# EAGLE board 555 parpadeo (EAGLE 8.0.0)
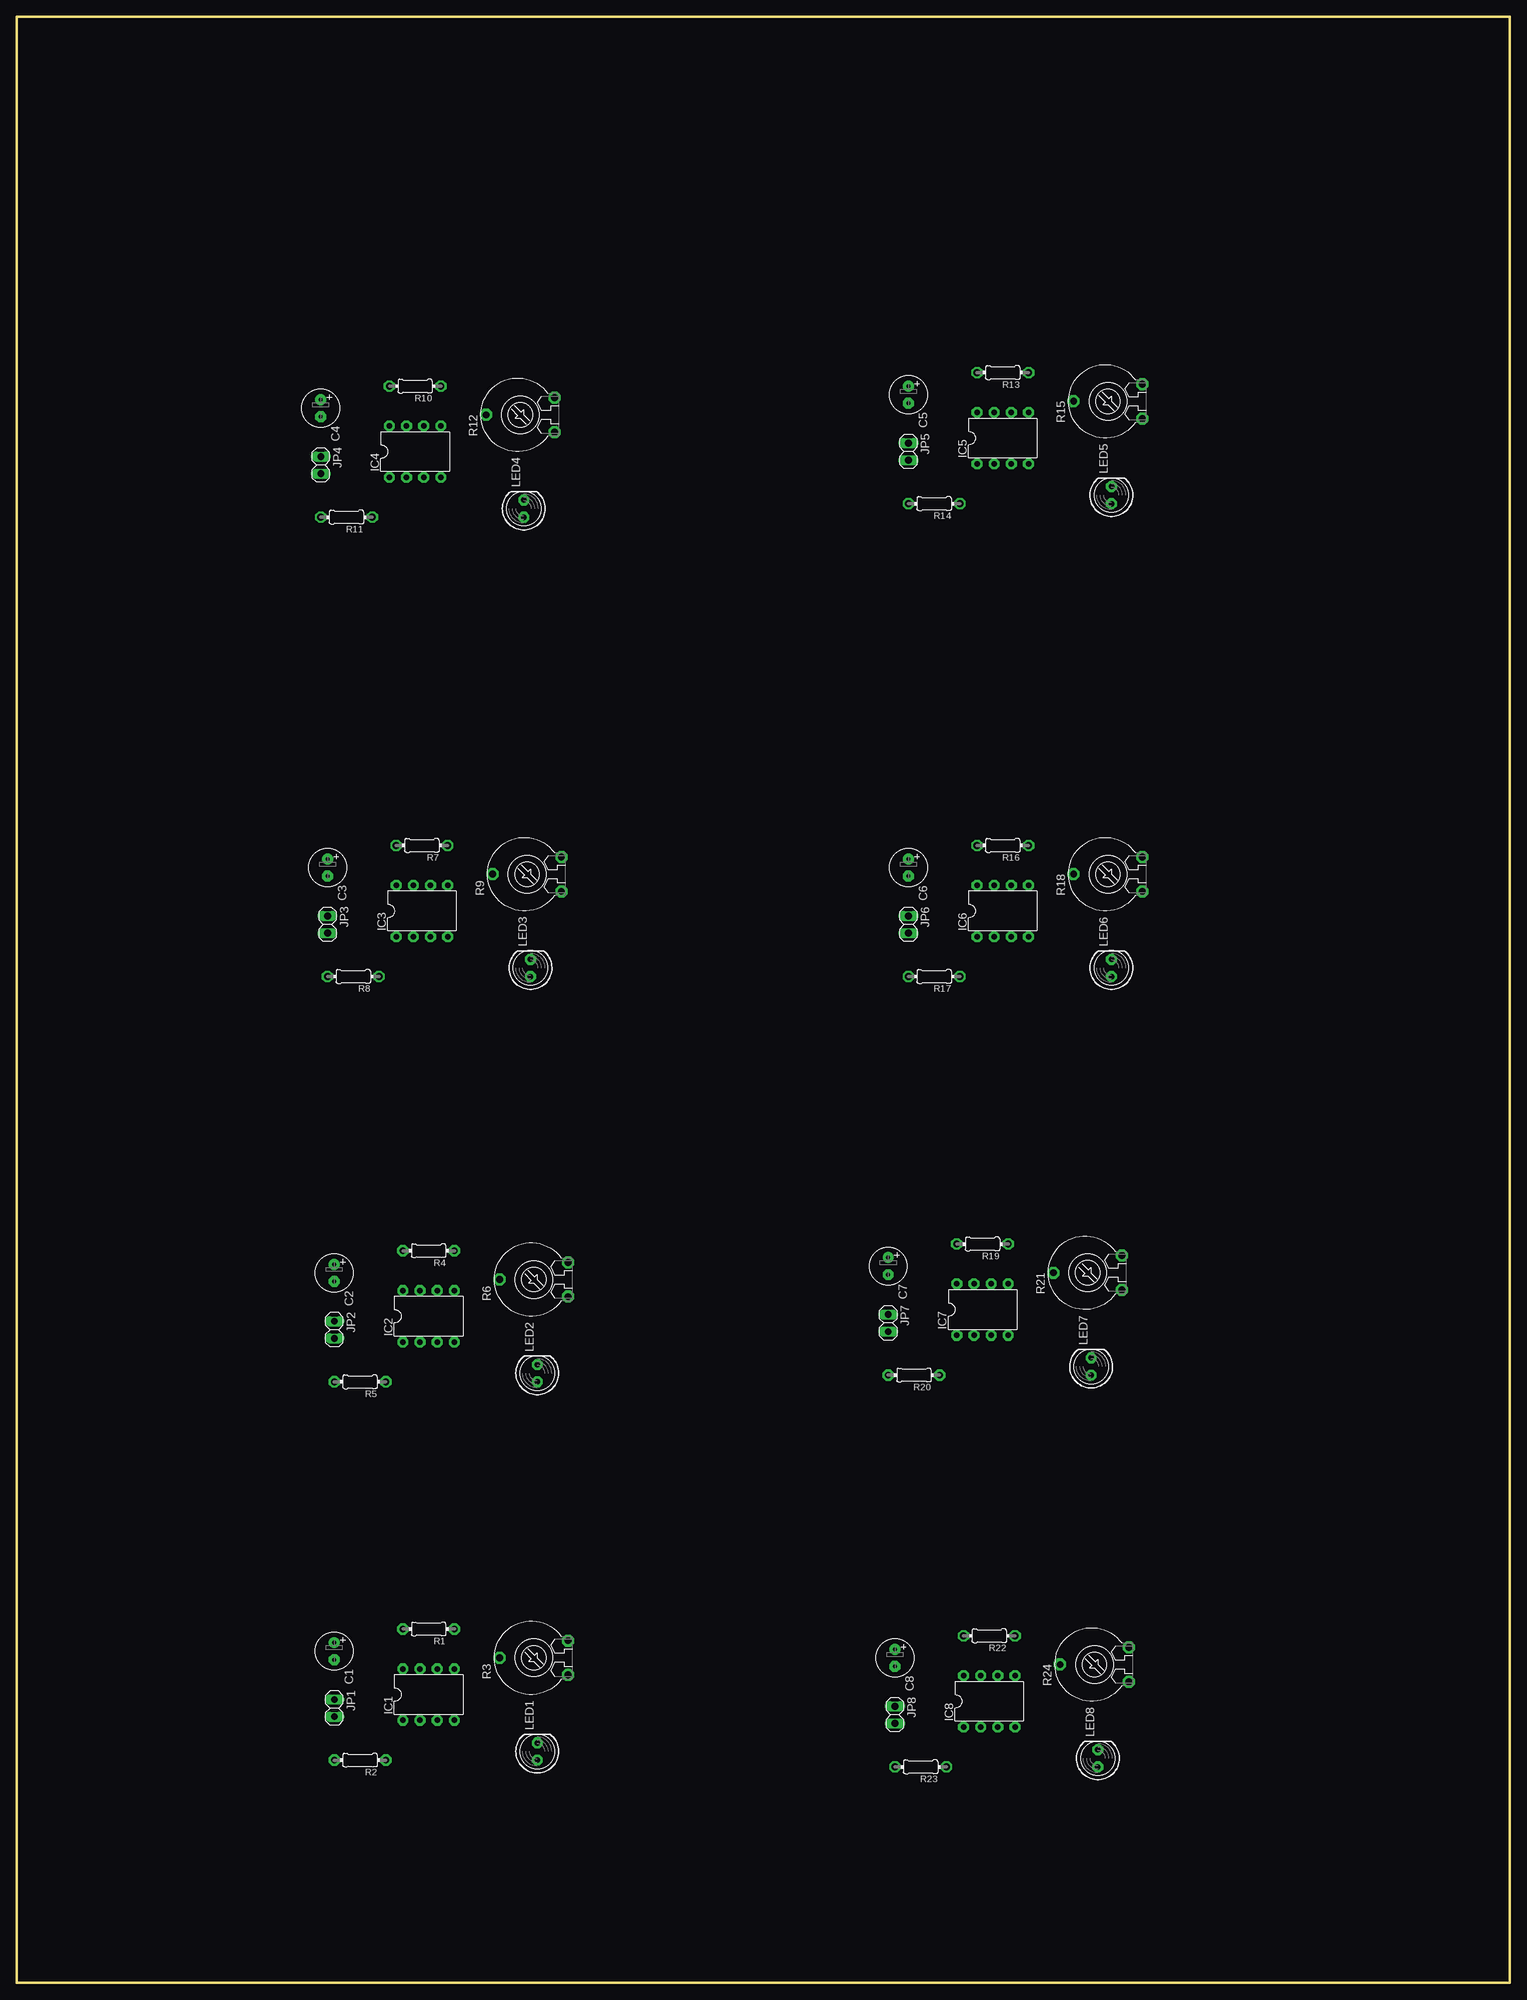
[diagram p0: board, top side]
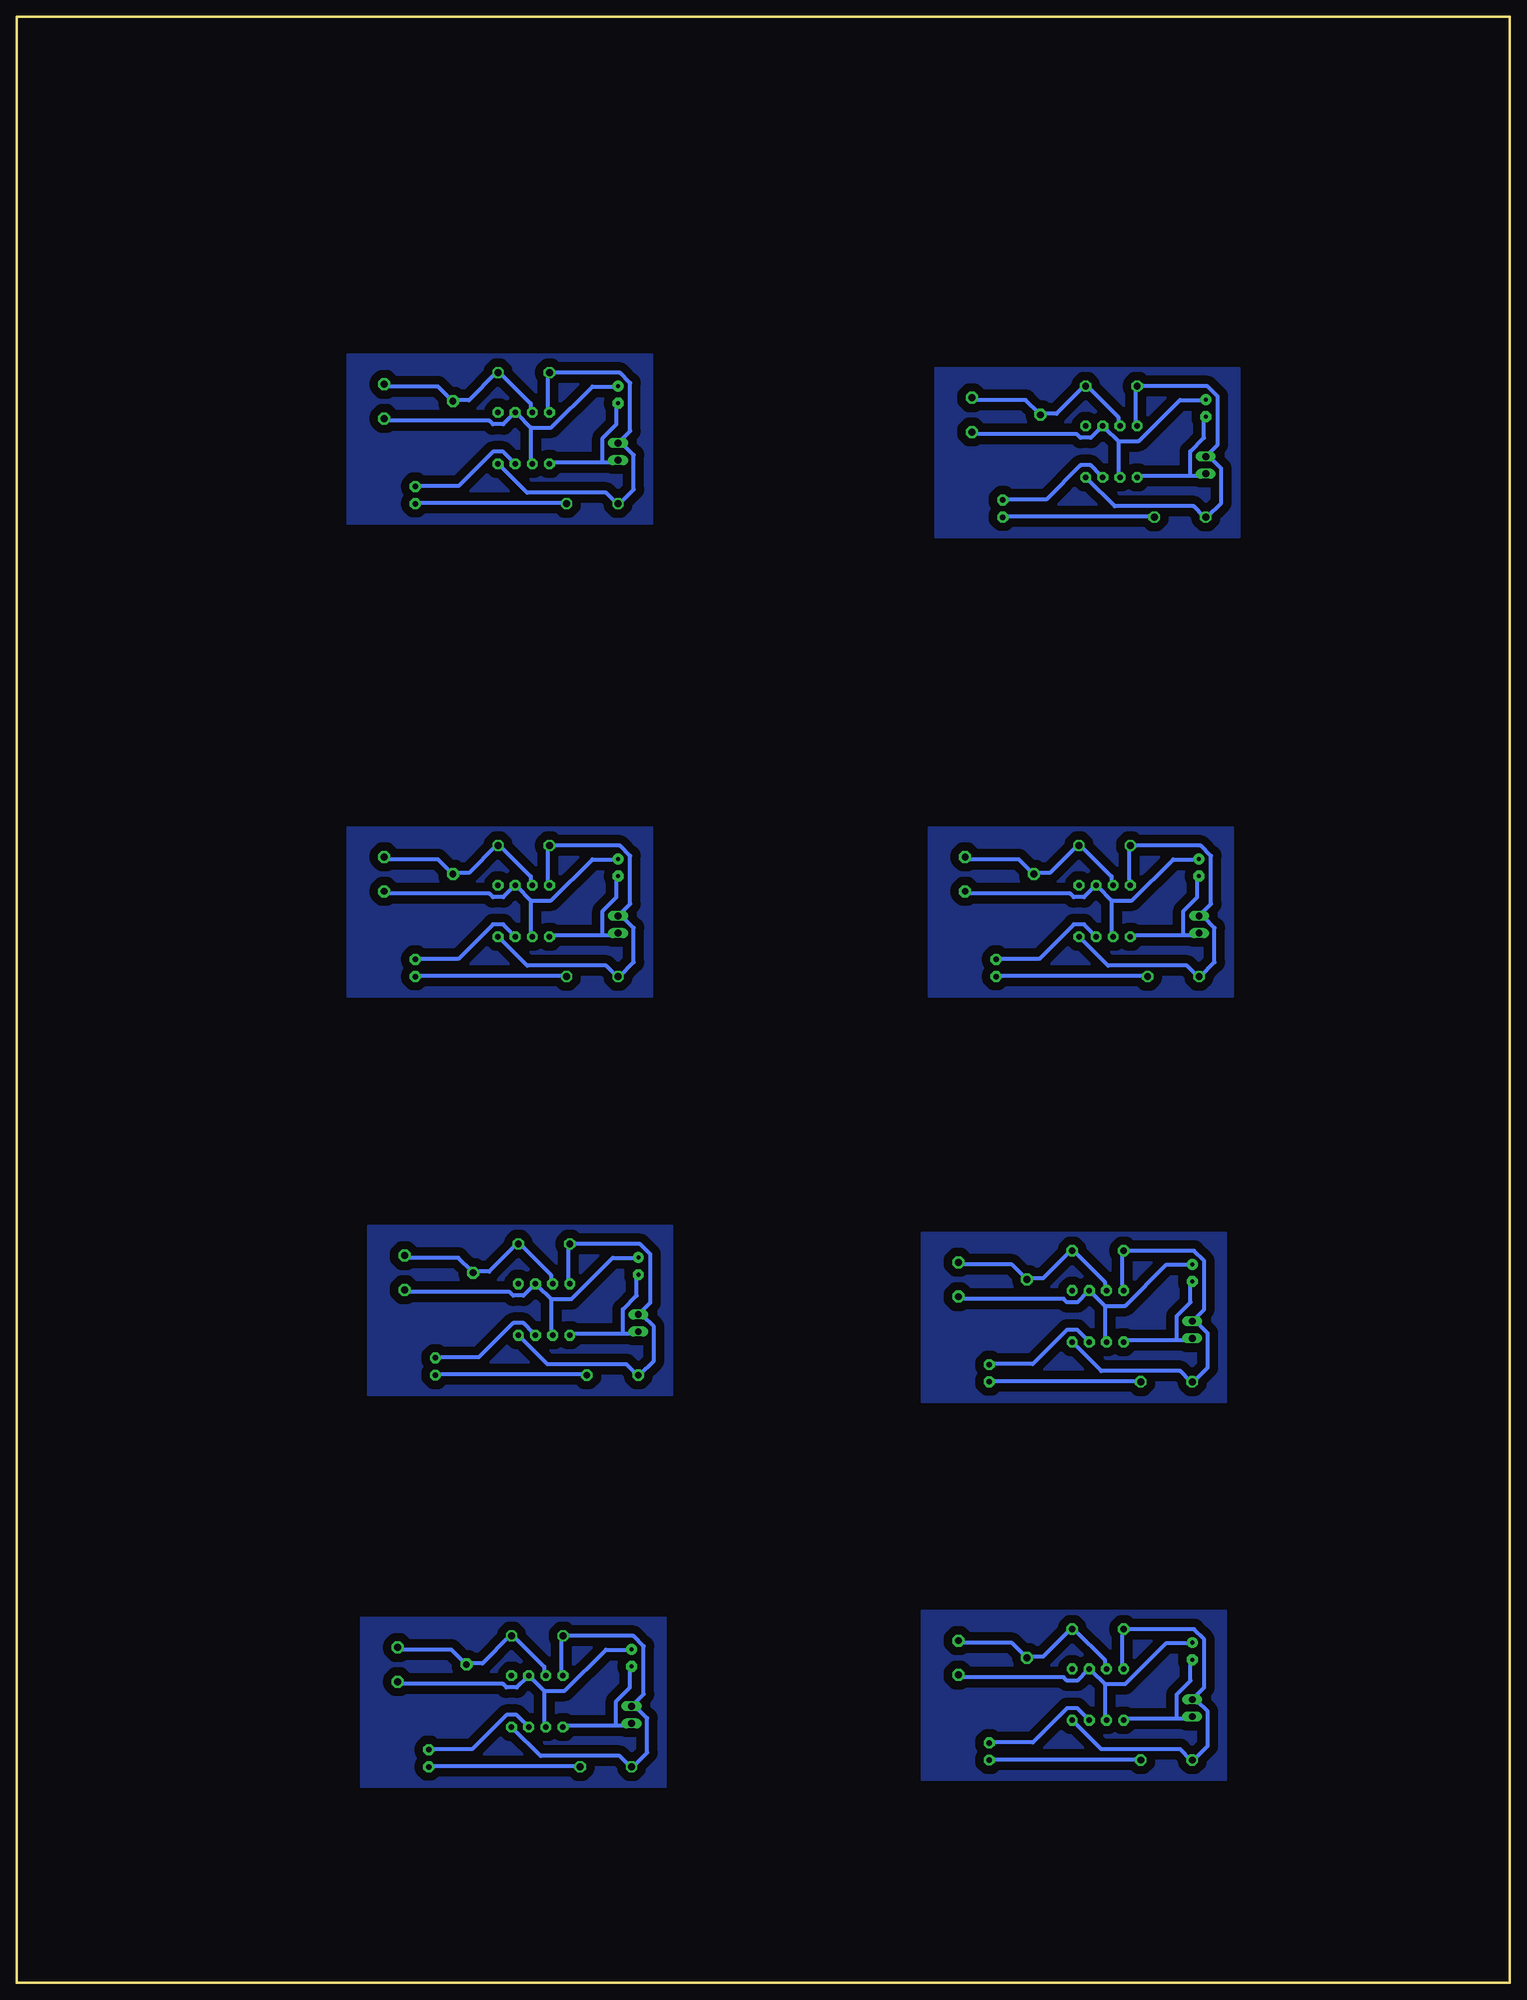
[diagram p1: board, bottom side, seen from below]

Size 221 x 291 mm. Coordinates in mm from the lower left corner, seen from the top.
Outline: 0,0 221,0 221,291 0,291 0,0
Copper layers (1*16): Top 0.035mm / dielectric 1.5mm / Bottom 0.035mm
Design rules "default *": minimum track width 22mil, minimum drill 24mil, track to track 18mil, track to pad 18mil, pad to pad 8mil, via to via 8mil, smd to smd 8mil, copper to edge 40mil, drill to drill 8mil, minimum pad ring 10mil, minimum via ring 8mil, stop-mask expansion 4mil, vias tented up to drill 0mil, thermal gap 10mil

## Footprints (pad centres in the part's own frame; a part is rotated, then mirrored left to right if it is on the bottom)
E2,5-6 = drill 0.6 pad 1.6: + -1.27,0 | drill 0.6 pad 1.6 octagon: - 1.27,0
DIL08 = drill 0.813 pad 1.6 octagon: 1 -3.81,-3.81; 2 -1.27,-3.81; 3 1.27,-3.81; 4 3.81,-3.81; 5 3.81,3.81; 6 1.27,3.81; 7 -1.27,3.81; 8 -3.81,3.81
1X02 = drill 1 long: 1 -1.27,0; 2 1.27,0
LED5MM = drill 0.813 pad 1.6 octagon: A -1.27,0; K 1.27,0
0204/7 = drill 1 pad 1.676 octagon: 1 -3.81,0; 2 3.81,0
PT-10 = drill 1.016 pad 1.778 octagon: 1 -2.54,-5.08; 2 2.54,-5.08; 3 0,5.08

## Placement (x,y rotation side)
C1  10u  [E2,5-6]  46.99,49.07 270 top
C2  10u  [E2,5-6]  46.99,105.07 270 top
C3  10u  [E2,5-6]  45.99,165.07 270 top
C4  10u  [E2,5-6]  44.99,233.07 270 top
C5  10u  [E2,5-6]  131.99,235.07 270 top
C6  10u  [E2,5-6]  131.99,165.07 270 top
C7  10u  [E2,5-6]  128.99,106.07 270 top
C8  10u  [E2,5-6]  129.99,48.07 270 top
IC1  LM555N  [DIL08]  60.96,42.64 0 top
IC2  LM555N  [DIL08]  60.96,98.64 0 top
IC3  LM555N  [DIL08]  59.96,158.64 0 top
IC4  LM555N  [DIL08]  58.96,226.64 0 top
IC5  LM555N  [DIL08]  145.96,228.64 0 top
IC6  LM555N  [DIL08]  145.96,158.64 0 top
IC7  LM555N  [DIL08]  142.96,99.64 0 top
IC8  LM555N  [DIL08]  143.96,41.64 0 top
JP1  [1X02]  46.99,40.64 270 top
JP2  [1X02]  46.99,96.64 270 top
JP3  [1X02]  45.99,156.64 270 top
JP4  [1X02]  44.99,224.64 270 top
JP5  [1X02]  131.99,226.64 270 top
JP6  [1X02]  131.99,156.64 270 top
JP7  [1X02]  128.99,97.64 270 top
JP8  [1X02]  129.99,39.64 270 top
LED1  [LED5MM]  77.04,34.21 90 top
LED2  [LED5MM]  77.04,90.21 90 top
LED3  [LED5MM]  76.04,150.21 90 top
LED4  [LED5MM]  75.04,218.21 90 top
LED5  [LED5MM]  162.04,220.21 90 top
LED6  [LED5MM]  162.04,150.21 90 top
LED7  [LED5MM]  159.04,91.21 90 top
LED8  [LED5MM]  160.04,33.21 90 top
R1  100k  [0204/7]  60.96,52.34 180 top
R2  330  [0204/7]  50.8,32.94 180 top
R3  100k  [PT-10]  76.53,48.09 90 top
R4  100k  [0204/7]  60.96,108.34 180 top
R5  330  [0204/7]  50.8,88.94 180 top
R6  100k  [PT-10]  76.53,104.09 90 top
R7  100k  [0204/7]  59.96,168.34 180 top
R8  330  [0204/7]  49.8,148.94 180 top
R9  100k  [PT-10]  75.53,164.09 90 top
R10  100k  [0204/7]  58.96,236.34 180 top
R11  330  [0204/7]  48.8,216.94 180 top
R12  100k  [PT-10]  74.53,232.09 90 top
R13  100k  [0204/7]  145.96,238.34 180 top
R14  330  [0204/7]  135.8,218.94 180 top
R15  100k  [PT-10]  161.53,234.09 90 top
R16  100k  [0204/7]  145.96,168.34 180 top
R17  330  [0204/7]  135.8,148.94 180 top
R18  100k  [PT-10]  161.53,164.09 90 top
R19  100k  [0204/7]  142.96,109.34 180 top
R20  330  [0204/7]  132.8,89.94 180 top
R21  100k  [PT-10]  158.53,105.09 90 top
R22  100k  [0204/7]  143.96,51.34 180 top
R23  330  [0204/7]  133.8,31.94 180 top
R24  100k  [PT-10]  159.53,47.09 90 top

## Library data of the parts
C1-C8 R1-R24 = rcl
IC1-IC8 = linear
JP1-JP8 = pinhead
LED1-LED8 = led

## Nets
GND: C1.- IC1.1 JP1.2
GND2: C2.- IC2.1 JP2.2
GND3: C3.- IC3.1 JP3.2
GND4: C4.- IC4.1 JP4.2
GND5: C5.- IC5.1 JP5.2
GND6: C6.- IC6.1 JP6.2
GND7: C7.- IC7.1 JP7.2
GND8: C8.- IC8.1 JP8.2
N$1: IC1.3 LED1.K
N$2: LED1.A R2.1
N$4: IC1.7 R1.1 R3.2 R3.3
N$5: C1.+ IC1.2 IC1.6 R3.1
N$10: IC2.3 LED2.K
N$11: LED2.A R5.1
N$12: IC2.7 R4.1 R6.2 R6.3
N$13: C2.+ IC2.2 IC2.6 R6.1
N$15: IC3.3 LED3.K
N$16: LED3.A R8.1
N$17: IC3.7 R7.1 R9.2 R9.3
N$18: C3.+ IC3.2 IC3.6 R9.1
N$20: IC4.3 LED4.K
N$21: LED4.A R11.1
N$22: IC4.7 R10.1 R12.2 R12.3
N$23: C4.+ IC4.2 IC4.6 R12.1
N$25: IC5.3 LED5.K
N$26: LED5.A R14.1
N$27: IC5.7 R13.1 R15.2 R15.3
N$28: C5.+ IC5.2 IC5.6 R15.1
N$30: IC6.3 LED6.K
N$31: LED6.A R17.1
N$32: IC6.7 R16.1 R18.2 R18.3
N$33: C6.+ IC6.2 IC6.6 R18.1
N$35: IC7.3 LED7.K
N$36: LED7.A R20.1
N$37: IC7.7 R19.1 R21.2 R21.3
N$38: C7.+ IC7.2 IC7.6 R21.1
N$40: IC8.3 LED8.K
N$41: LED8.A R23.1
N$42: IC8.7 R22.1 R24.2 R24.3
N$43: C8.+ IC8.2 IC8.6 R24.1
VCC: IC1.4 IC1.8 JP1.1 R1.2 R2.2
VCC2: IC2.4 IC2.8 JP2.1 R4.2 R5.2
VCC3: IC3.4 IC3.8 JP3.1 R7.2 R8.2
VCC4: IC4.4 IC4.8 JP4.1 R10.2 R11.2
VCC5: IC5.4 IC5.8 JP5.1 R13.2 R14.2
VCC6: IC6.4 IC6.8 JP6.1 R16.2 R17.2
VCC7: IC7.4 IC7.8 JP7.1 R19.2 R20.2
VCC8: IC8.4 IC8.8 JP8.1 R22.2 R23.2

## Tracks (layer width: path | path; a pad name or v marks a point on that pad's centre or on a via)
GND
  Bottom 0.559: 49.28,39.12 56.9,39.12 IC1.1 | 49.28,39.12 47.24,39.12 JP1.2 | 49.28,39.12 49.28,42.67 47.24,44.7 47.24,47.75 C1.-
GND2
  Bottom 0.559: 49.28,95.12 56.9,95.12 IC2.1 | 49.28,95.12 47.24,95.12 JP2.2 | 49.28,95.12 49.28,98.67 47.24,100.7 47.24,103.75 C2.-
GND3
  Bottom 0.559: 48.28,155.12 55.9,155.12 IC3.1 | 48.28,155.12 46.24,155.12 JP3.2 | 48.28,155.12 48.28,158.67 46.24,160.7 46.24,163.75 C3.-
GND4
  Bottom 0.559: 47.28,223.12 54.9,223.12 IC4.1 | 47.28,223.12 45.24,223.12 JP4.2 | 47.28,223.12 47.28,226.67 45.24,228.7 45.24,231.75 C4.-
GND5
  Bottom 0.559: 134.28,225.12 141.9,225.12 IC5.1 | 134.28,225.12 132.24,225.12 JP5.2 | 134.28,225.12 134.28,228.67 132.24,230.7 132.24,233.75 C5.-
GND6
  Bottom 0.559: 134.28,155.12 141.9,155.12 IC6.1 | 134.28,155.12 132.24,155.12 JP6.2 | 134.28,155.12 134.28,158.67 132.24,160.7 132.24,163.75 C6.-
GND7
  Bottom 0.559: 131.28,96.12 138.9,96.12 IC7.1 | 131.28,96.12 129.24,96.12 JP7.2 | 131.28,96.12 131.28,99.67 129.24,101.7 129.24,104.75 C7.-
GND8
  Bottom 0.559: 132.28,38.12 139.9,38.12 IC8.1 | 132.28,38.12 130.24,38.12 JP8.2 | 132.28,38.12 132.28,41.67 130.24,43.7 130.24,46.75 C8.-
N$1
  Bottom 0.559: LED1.K 76.71,35.56 70.61,35.56 65.53,40.64 64.01,40.64 62.48,39.12 IC1.3
N$2
  Bottom 0.559: LED1.A 76.71,33.02 54.86,33.02 R2.1
N$3
  pour Bottom (isolate 1.27): 42,55 87,55 87,30 42,30
N$4
  Bottom 0.559: IC1.7 59.94,46.74 59.94,47.75 64.52,52.32 R1.1 65.02,52.32 69.09,48.26 71.12,48.26 R3.3 71.63,48.26 73.66,50.29 81.28,50.29 R3.2
N$5
  Bottom 0.559: 59.94,44.2 59.94,39.12 IC1.2 | 59.94,44.2 61.98,46.23 IC1.6 62.48,46.23 64.01,44.7 65.53,44.7 66.04,45.21 81.28,45.21 R3.1 | 59.94,44.2 56.9,44.2 50.8,50.29 47.24,50.29 C1.+
N$10
  Bottom 0.559: LED2.K 76.71,91.56 70.61,91.56 65.53,96.64 64.01,96.64 62.48,95.12 IC2.3
N$11
  Bottom 0.559: LED2.A 76.71,89.02 54.86,89.02 R5.1
N$12
  Bottom 0.559: IC2.7 59.94,102.74 59.94,103.75 64.52,108.32 R4.1 65.02,108.32 69.09,104.26 71.12,104.26 R6.3 71.63,104.26 73.66,106.29 81.28,106.29 R6.2
N$13
  Bottom 0.559: 59.94,100.2 59.94,95.12 IC2.2 | 59.94,100.2 61.98,102.23 IC2.6 62.48,102.23 64.01,100.7 65.53,100.7 66.04,101.21 81.28,101.21 R6.1 | 59.94,100.2 56.9,100.2 50.8,106.29 47.24,106.29 C2.+
N$14
  pour Bottom (isolate 1.27): 42,111 87,111 87,86 42,86
N$15
  Bottom 0.559: LED3.K 75.71,151.56 69.61,151.56 64.53,156.64 63.01,156.64 61.48,155.12 IC3.3
N$16
  Bottom 0.559: LED3.A 75.71,149.02 53.86,149.02 R8.1
N$17
  Bottom 0.559: IC3.7 58.94,162.74 58.94,163.75 63.52,168.32 R7.1 64.02,168.32 68.09,164.26 70.12,164.26 R9.3 70.63,164.26 72.66,166.29 80.28,166.29 R9.2
N$18
  Bottom 0.559: 58.94,160.2 58.94,155.12 IC3.2 | 58.94,160.2 60.98,162.23 IC3.6 61.48,162.23 63.01,160.7 64.53,160.7 65.04,161.21 80.28,161.21 R9.1 | 58.94,160.2 55.9,160.2 49.8,166.29 46.24,166.29 C3.+
N$19
  pour Bottom (isolate 1.27): 41,171 86,171 86,146 41,146
N$20
  Bottom 0.559: LED4.K 74.71,219.56 68.61,219.56 63.53,224.64 62.01,224.64 60.48,223.12 IC4.3
N$21
  Bottom 0.559: LED4.A 74.71,217.02 52.86,217.02 R11.1
N$22
  Bottom 0.559: IC4.7 57.94,230.74 57.94,231.75 62.52,236.32 R10.1 63.02,236.32 67.09,232.26 69.12,232.26 R12.3 69.63,232.26 71.66,234.29 79.28,234.29 R12.2
N$23
  Bottom 0.559: 57.94,228.2 57.94,223.12 IC4.2 | 57.94,228.2 59.98,230.23 IC4.6 60.48,230.23 62.01,228.7 63.53,228.7 64.04,229.21 79.28,229.21 R12.1 | 57.94,228.2 54.9,228.2 48.8,234.29 45.24,234.29 C4.+
N$24
  pour Bottom (isolate 1.27): 40,239 85,239 85,214 40,214
N$25
  Bottom 0.559: LED5.K 161.71,221.56 155.61,221.56 150.53,226.64 149.01,226.64 147.48,225.12 IC5.3
N$26
  Bottom 0.559: LED5.A 161.71,219.02 139.86,219.02 R14.1
N$27
  Bottom 0.559: IC5.7 144.94,232.74 144.94,233.75 149.52,238.32 R13.1 150.02,238.32 154.09,234.26 156.12,234.26 R15.3 156.63,234.26 158.66,236.29 166.28,236.29 R15.2
N$28
  Bottom 0.559: 144.94,230.2 144.94,225.12 IC5.2 | 144.94,230.2 146.98,232.23 IC5.6 147.48,232.23 149.01,230.7 150.53,230.7 151.04,231.21 166.28,231.21 R15.1 | 144.94,230.2 141.9,230.2 135.8,236.29 132.24,236.29 C5.+
N$29
  pour Bottom (isolate 1.27): 127,241 172,241 172,216 127,216
N$30
  Bottom 0.559: LED6.K 161.71,151.56 155.61,151.56 150.53,156.64 149.01,156.64 147.48,155.12 IC6.3
N$31
  Bottom 0.559: LED6.A 161.71,149.02 139.86,149.02 R17.1
N$32
  Bottom 0.559: IC6.7 144.94,162.74 144.94,163.75 149.52,168.32 R16.1 150.02,168.32 154.09,164.26 156.12,164.26 R18.3 156.63,164.26 158.66,166.29 166.28,166.29 R18.2
N$33
  Bottom 0.559: 144.94,160.2 144.94,155.12 IC6.2 | 144.94,160.2 146.98,162.23 IC6.6 147.48,162.23 149.01,160.7 150.53,160.7 151.04,161.21 166.28,161.21 R18.1 | 144.94,160.2 141.9,160.2 135.8,166.29 132.24,166.29 C6.+
N$34
  pour Bottom (isolate 1.27): 127,171 172,171 172,146 127,146
N$35
  Bottom 0.559: LED7.K 158.71,92.56 152.61,92.56 147.53,97.64 146.01,97.64 144.48,96.12 IC7.3
N$36
  Bottom 0.559: LED7.A 158.71,90.02 136.86,90.02 R20.1
N$37
  Bottom 0.559: IC7.7 141.94,103.74 141.94,104.75 146.52,109.32 R19.1 147.02,109.32 151.09,105.26 153.12,105.26 R21.3 153.63,105.26 155.66,107.29 163.28,107.29 R21.2
N$38
  Bottom 0.559: 141.94,101.2 141.94,96.12 IC7.2 | 141.94,101.2 143.98,103.23 IC7.6 144.48,103.23 146.01,101.7 147.53,101.7 148.04,102.21 163.28,102.21 R21.1 | 141.94,101.2 138.9,101.2 132.8,107.29 129.24,107.29 C7.+
N$39
  pour Bottom (isolate 1.27): 124,112 169,112 169,87 124,87
N$40
  Bottom 0.559: LED8.K 159.71,34.56 153.61,34.56 148.53,39.64 147.01,39.64 145.48,38.12 IC8.3
N$41
  Bottom 0.559: LED8.A 159.71,32.02 137.86,32.02 R23.1
N$42
  Bottom 0.559: IC8.7 142.94,45.74 142.94,46.75 147.52,51.32 R22.1 148.02,51.32 152.09,47.26 154.12,47.26 R24.3 154.63,47.26 156.66,49.29 164.28,49.29 R24.2
N$43
  Bottom 0.559: 142.94,43.2 142.94,38.12 IC8.2 | 142.94,43.2 144.98,45.23 IC8.6 145.48,45.23 147.01,43.7 148.53,43.7 149.04,44.21 164.28,44.21 R24.1 | 142.94,43.2 139.9,43.2 133.8,49.29 130.24,49.29 C8.+
N$44
  pour Bottom (isolate 1.27): 125,54 170,54 170,29 125,29
VCC
  Bottom 0.559: IC1.8 57.4,46.74 57.4,52.32 R1.2 56.9,52.32 46.74,52.32 45.21,50.8 45.21,43.69 JP1.1 46.74,41.66 46.23,41.66 44.7,40.13 44.7,35.05 46.74,33.02 R2.2 47.24,33.02 48.77,34.54 60.45,34.54 64.52,38.61 IC1.4
VCC2
  Bottom 0.559: IC2.8 57.4,102.74 57.4,108.32 R4.2 56.9,108.32 46.74,108.32 45.21,106.8 45.21,99.69 JP2.1 46.74,97.66 46.23,97.66 44.7,96.13 44.7,91.05 46.74,89.02 R5.2 47.24,89.02 48.77,90.54 60.45,90.54 64.52,94.61 IC2.4
VCC3
  Bottom 0.559: IC3.8 56.4,162.74 56.4,168.32 R7.2 55.9,168.32 45.74,168.32 44.21,166.8 44.21,159.69 JP3.1 45.74,157.66 45.23,157.66 43.7,156.13 43.7,151.05 45.74,149.02 R8.2 46.24,149.02 47.77,150.54 59.45,150.54 63.52,154.61 IC3.4
VCC4
  Bottom 0.559: IC4.8 55.4,230.74 55.4,236.32 R10.2 54.9,236.32 44.74,236.32 43.21,234.8 43.21,227.69 JP4.1 44.74,225.66 44.23,225.66 42.7,224.13 42.7,219.05 44.74,217.02 R11.2 45.24,217.02 46.77,218.54 58.45,218.54 62.52,222.61 IC4.4
VCC5
  Bottom 0.559: IC5.8 142.4,232.74 142.4,238.32 R13.2 141.9,238.32 131.74,238.32 130.21,236.8 130.21,229.69 JP5.1 131.74,227.66 131.23,227.66 129.7,226.13 129.7,221.05 131.74,219.02 R14.2 132.24,219.02 133.77,220.54 145.45,220.54 149.52,224.61 IC5.4
VCC6
  Bottom 0.559: IC6.8 142.4,162.74 142.4,168.32 R16.2 141.9,168.32 131.74,168.32 130.21,166.8 130.21,159.69 JP6.1 131.74,157.66 131.23,157.66 129.7,156.13 129.7,151.05 131.74,149.02 R17.2 132.24,149.02 133.77,150.54 145.45,150.54 149.52,154.61 IC6.4
VCC7
  Bottom 0.559: IC7.8 139.4,103.74 139.4,109.32 R19.2 138.9,109.32 128.74,109.32 127.21,107.8 127.21,100.69 JP7.1 128.74,98.66 128.23,98.66 126.7,97.13 126.7,92.05 128.74,90.02 R20.2 129.24,90.02 130.77,91.54 142.45,91.54 146.52,95.61 IC7.4
VCC8
  Bottom 0.559: IC8.8 140.4,45.74 140.4,51.32 R22.2 139.9,51.32 129.74,51.32 128.21,49.8 128.21,42.69 JP8.1 129.74,40.66 129.23,40.66 127.7,39.13 127.7,34.05 129.74,32.02 R23.2 130.24,32.02 131.77,33.54 143.45,33.54 147.52,37.61 IC8.4